# Altium PCB SFControl.PcbDoc
Units mm, origin at the board's own origin, x right, y up, seen from the top; angles counter-clockwise.
Board outline 135 x 97.5 mm, 2 copper layers (Top Layer, Bottom Layer); 79 components, 62 nets, 250 pads, 57 vias.
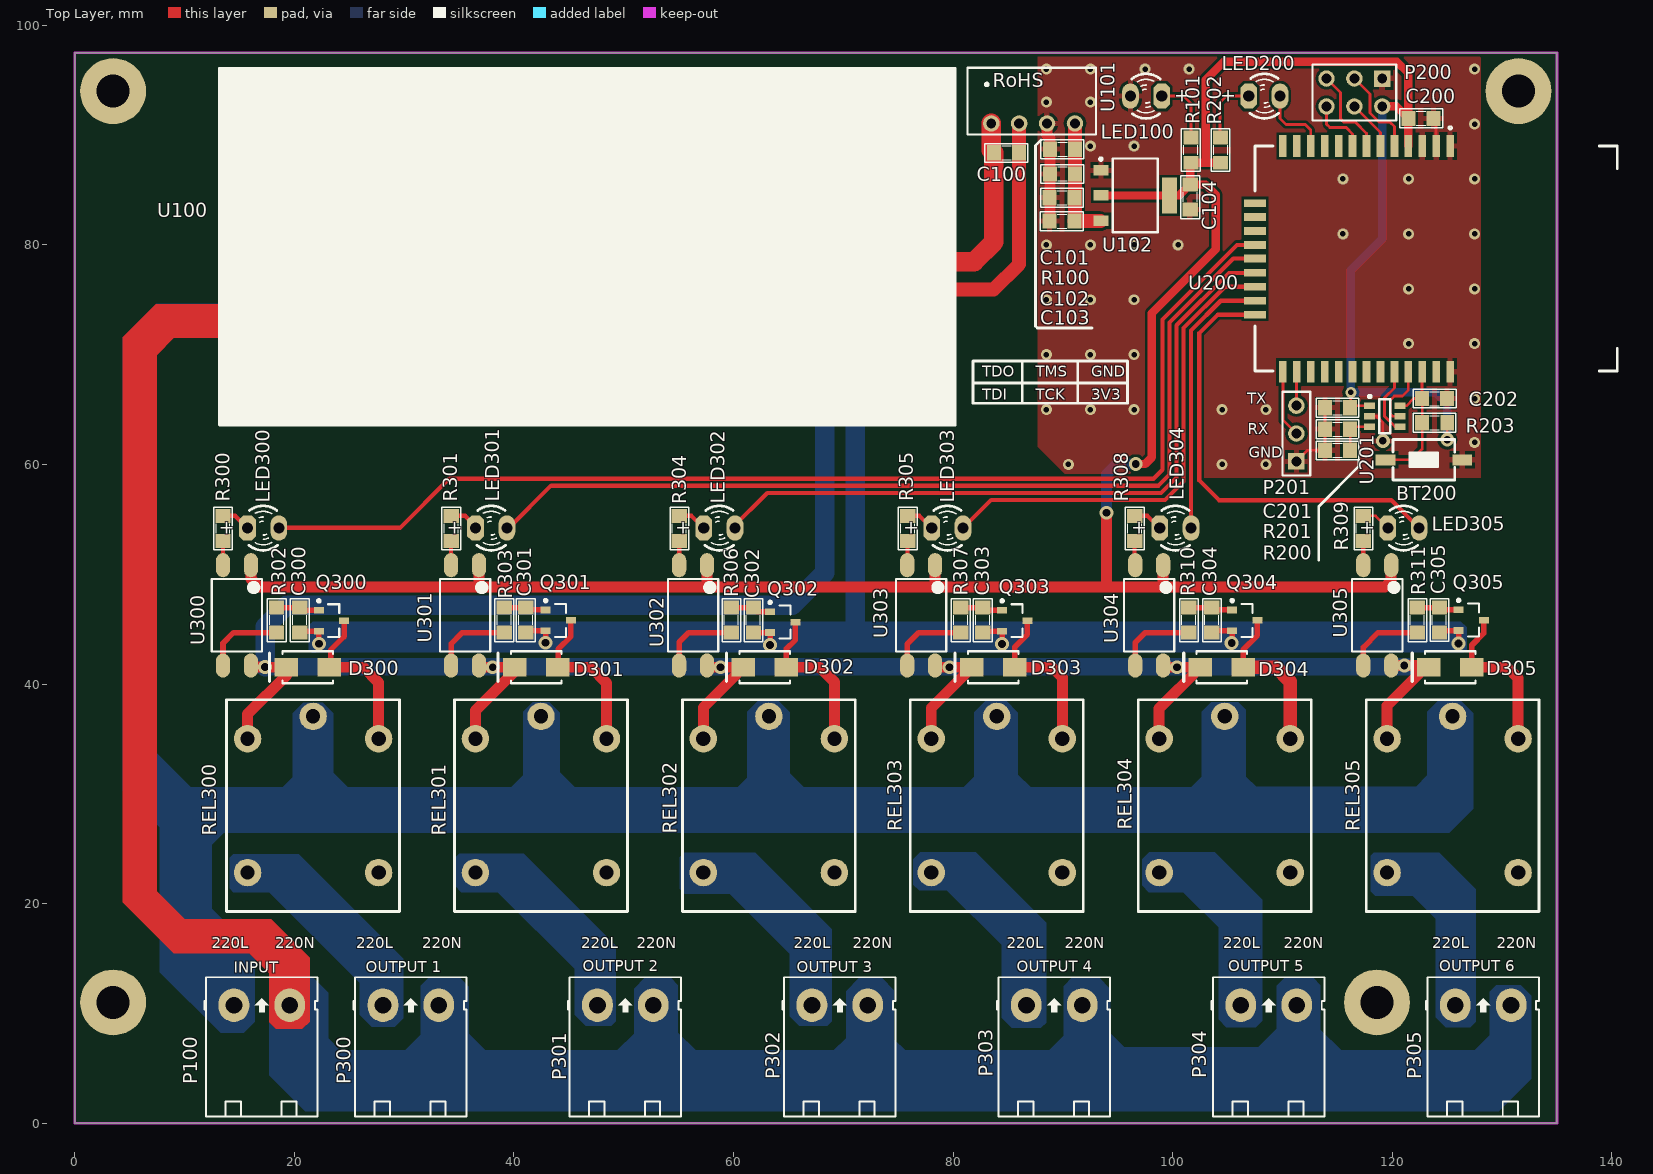
[diagram p0: Top Layer view]
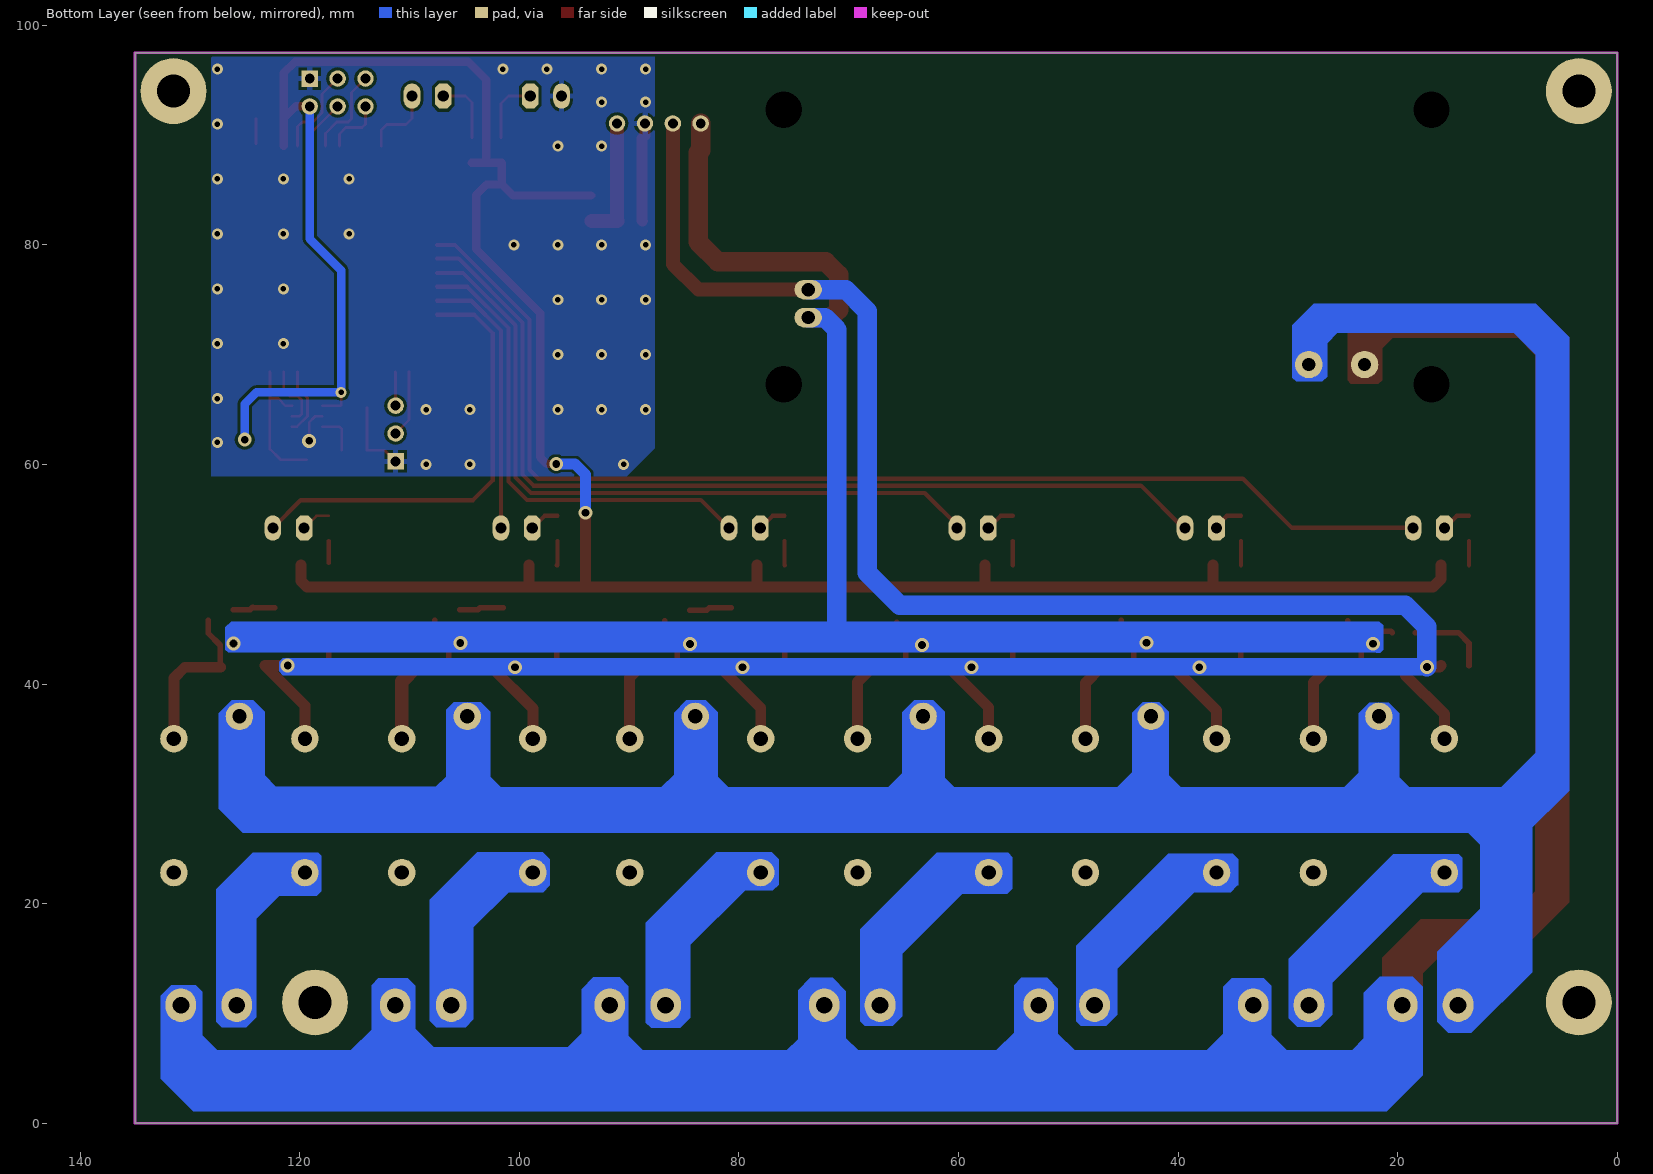
[diagram p1: Bottom Layer view, seen from below]
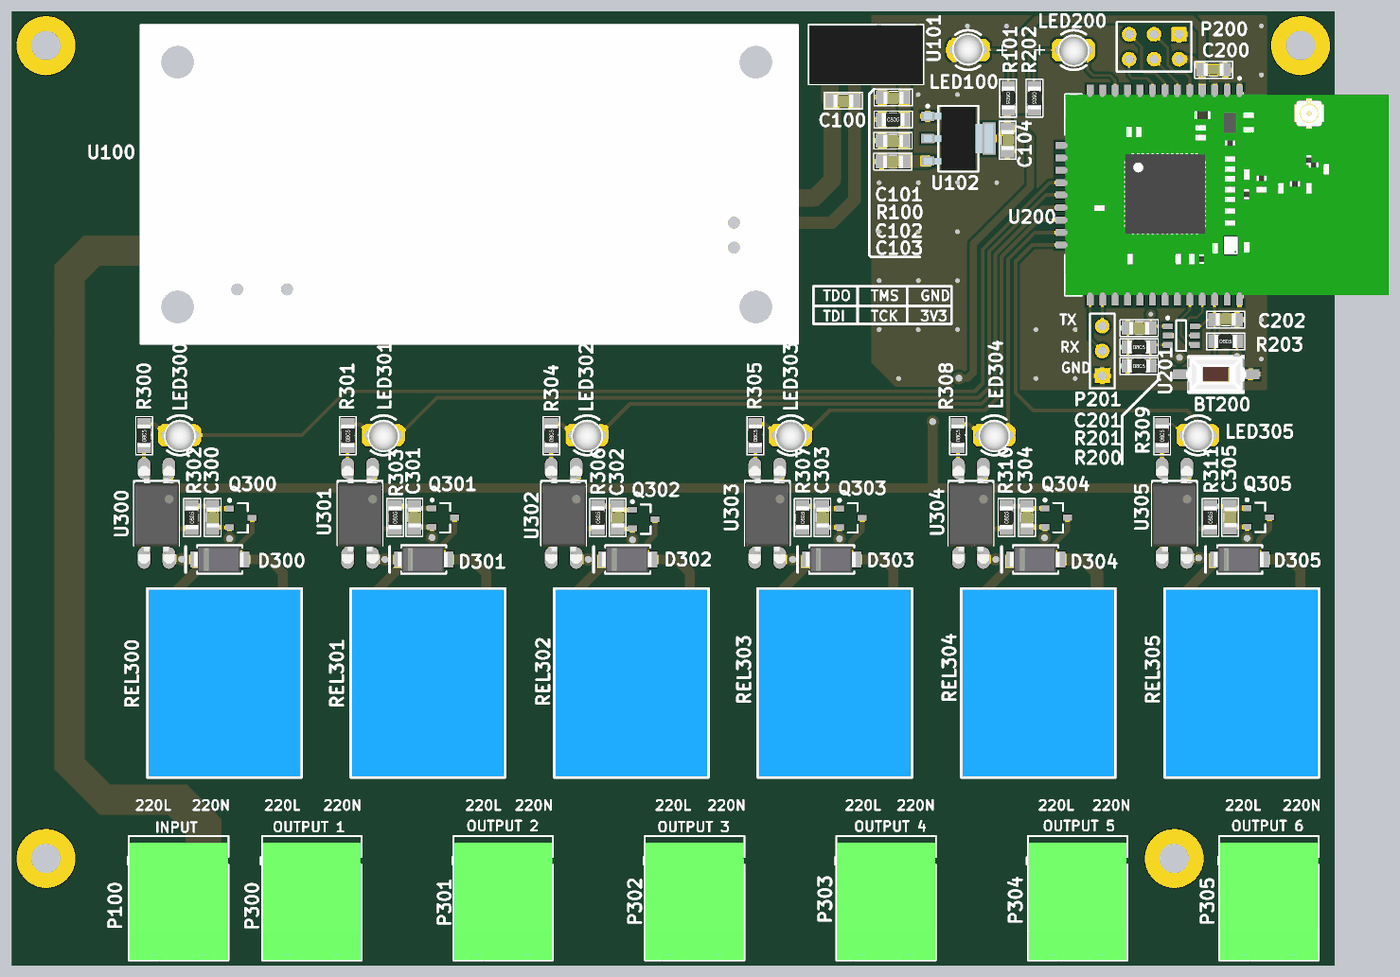
[diagram p2: 3D render of the assembled board from above, using the file's embedded part models]

## Layer stack, top to bottom
Top Solder: solder mask 0.0102, Solder Resist, Dk 3.5
Top Layer: signal copper 0.0356
Dielectric 1: dielectric 0.32, FR-4, Dk 4.8
Bottom Layer: signal copper 0.0356
Bottom Solder: solder mask 0.0102, Solder Resist, Dk 3.5

## Board outline
0,0 0,97.5 135,97.5 135,0

## Design rules (kind name [scope] priority, off if disabled: settings)
Clearance [All] p1: gap=0.254
PlaneConnect [All] p1: planeconnectstyle=Relief reliefexpansion=0.508 reliefentries=4 reliefconductorwidth=0.762 reliefairgap=0.254
PolygonConnect PolygonConnect_Via [IsVia] p1: connectstyle=Direct reliefconductorwidth=0.254 reliefentries=4 polygonreliefangle="90 Angle" airgapwidth=0.254
PolygonConnect [All] p2: connectstyle=Relief reliefconductorwidth=0.508 reliefentries=4 polygonreliefangle="90 Angle" airgapwidth=0.254
RoutingVias [All] p1: holewidth=0.711 width=1.27 viastyle="Through Hole" minholewidth=0.711 minwidth=1.27 maxholewidth=0.711 maxwidth=1.27
SolderMaskExpansion [All] p1: expansion=0.102
Width [All] p1: maxlimit=2.54 minlimit=0.254 preferedwidth=0.254
29 further rules are at their usual default settings.

## Classes and differential pairs
component class Connectivity: BT200 C200 C201 C202 LED200 P200 P201 R200 R201 R202 R203 U200 U201
component class Control: C300 C301 C302 C303 C304 C305 D300 D301 D302 D303 D304 D305 LED300 LED301 LED302 LED303 LED304 LED305 P300 P301 P302 P303 P304 P305 Q300 Q301 Q302 Q303 Q304 Q305 R300 R301 R302 R303 R304 R305 R306 R307 R308 R309 R310 R311 REL300 REL301 REL302 REL303 REL304 REL305 U300 U301 U302 U303 U304 U305
component class Power: C100 C101 C102 C103 C104 LED100 P100 R100 R101 U100 U101 U102

## Components (designator, comment, footprint, x,y, rotation, side; value= is the part's Value field where it differs from the comment)
BT200 "Button" SWSMD 122.88,60.426 r0 top
C100 "2.2uF" "0805 cap" 83.713,88.391 r0 top
C101 "2.2uF" "0805 cap" 88.818,88.721 r0 top
C102 "10uF" "0805 cap" 88.793,84.302 r0 top
C103 "0.1uF" "0805 cap" 88.767,82.168 r0 top
C104 "10uF" "0805 cap" 101.594,83.209 r90 top
C200 "0.1uF" "0805 cap" 123.769,91.515 r180 top
C201 "0.1µF" "0805 cap" 113.888,65.175 r0 top
C202 "0.1uF" "0805 cap" 125,66 r180 top
C300 "0.1uF" "0805 cap" 20.492,44.678 r90 top
C301 "0.1uF" "0805 cap" 41.066,44.678 r90 top
C302 "0.1uF" "0805 cap" 61.818,44.678 r90 top
C303 "0.1uF" "0805 cap" 82.697,44.678 r90 top
C304 "0.1uF" "0805 cap" 103.565,44.678 r90 top
C305 "0.1uF" "0805 cap" 124.302,44.703 r90 top
D300 "1N4007" SMA-diode 21.229,41.528 r0 top
D301 "1N4007" SMA-diode 42.042,41.528 r0 top
D302 "1N4007" SMA-diode 62.854,41.528 r0 top
D303 "1N4007" SMA-diode 83.667,41.528 r0 top
D304 "1N4007" SMA-diode 104.48,41.528 r0 top
D305 "1N4007" SMA-diode 125.293,41.528 r0 top
LED100 "LED 3mm green" "LED 3mm green" 99.004,93.547 r180 top
LED200 "LED 3mm green" "LED 3mm green" 106.928,93.547 r0 top
LED300 "LED 3mm green" "LED 3mm green" 15.742,54.203 r0 top locked
LED301 "LED 3mm green" "LED 3mm green" 36.515,54.203 r0 top locked
LED302 "LED 3mm green" "LED 3mm green" 57.287,54.203 r0 top locked
LED303 "LED 3mm green" "LED 3mm green" 78.059,54.203 r0 top locked
LED304 "LED 3mm green" "LED 3mm green" 98.831,54.203 r0 top locked
LED305 "LED 3mm green" "LED 3mm green" 119.603,54.203 r0 top locked
P100 "Header 2" HED2T 14.5,10.75 r0 top
P200 "Header 3X2" HDR2X3 116.555,93.877 r180 top
P201 "Header 3" HDR1X3 111.272,62.813 r90 top
P300 "Header 2" HED2T 28.076,10.75 r0 top
P301 "Header 2" HED2T 47.611,10.75 r0 top
P302 "Header 2" HED2T 67.146,10.75 r0 top
P303 "Header 2" HED2T 86.68,10.75 r0 top
P304 "Header 2" HED2T 106.215,10.75 r0 top
P305 "Header 2" HED2T 125.75,10.75 r0 top
Q300 "MMBT3904" SOT23-3LN 23.388,45.77 r0 top
Q301 "MMBT3904" SOT23-3LN 44.038,45.795 r0 top
Q302 "MMBT3904" SOT23-3LN 64.485,45.64 r0 top
Q303 "MMBT3904" SOT23-3LN 85.618,45.77 r0 top
Q304 "MMBT3904" SOT23-3LN 106.573,45.795 r0 top
Q305 "MMBT3904" SOT23-3LN 127.198,45.821 r0 top
R100 "680-0.5W" "0805 Resistor" 88.818,86.461 r0 top
R101 "1k" "0805 Resistor" 101.671,89.763 r270 top
R200 "187k" "0805 Resistor" 113.888,61.289 r0 top
R201 "182k" "0805 Resistor" 113.888,63.22 r0 top
R202 "1k" "0805 Resistor" 104.363,89.763 r270 top
R203 "10k" "0805 Resistor" 122.727,63.804 r0 top
R300 "560" "0805 Resistor" 13.507,53.034 r90 top
R301 "560" "0805 Resistor" 34.284,53.034 r90 top
R302 "1K" "0805 Resistor" 18.384,44.678 r90 top
R303 "1K" "0805 Resistor" 39.11,44.678 r90 top
R304 "560" "0805 Resistor" 55.062,53.034 r90 top
R305 "560" "0805 Resistor" 75.864,53.034 r90 top
R306 "1K" "0805 Resistor" 59.811,44.678 r90 top
R307 "1K" "0805 Resistor" 80.69,44.678 r90 top
R308 "560" "0805 Resistor" 96.54,53.034 r90 top
R309 "560" "0805 Resistor" 117.368,53.034 r90 top
R310 "1K" "0805 Resistor" 101.482,44.678 r90 top
R311 "1K" "0805 Resistor" 122.295,44.678 r90 top
REL300 "RELAY 5V 10A" "RELAY 5V-10A" 21.711,29.94 r180 top locked
REL301 "RELAY 5V 10A" "RELAY 5V-10A" 42.469,29.94 r180 top locked
REL302 "RELAY 5V 10A" "RELAY 5V-10A" 63.227,29.94 r180 top locked
REL303 "RELAY 5V 10A" "RELAY 5V-10A" 83.985,29.94 r180 top locked
REL304 "RELAY 5V 10A" "RELAY 5V-10A" 104.742,29.94 r180 top locked
REL305 "RELAY 5V 10A" "RELAY 5V-10A" 125.5,29.94 r180 top locked
U100 "ACDC" ACDC 13.177,96.062 r0 top locked
U101 "B0505S-1W" B0505S-1W 83.484,91.058 r0 top locked
U102 "AMS1117" SOT223-3 93.466,86.791 r0 top
U200 "" VZIGMOD2 107.5,89 r270 top locked
U201 "TPL5010-Q1" SOT23-6 119.324,64.388 r0 top
U300 "PC817" "PC817 SMD" 14.777,46.252 r270 top
U301 "PC817" "PC817 SMD" 35.549,46.252 r270 top
U302 "PC817" "PC817 SMD" 56.321,46.252 r270 top
U303 "PC817" "PC817 SMD" 77.094,46.252 r270 top
U304 "PC817" "PC817 SMD" 97.866,46.252 r270 top
U305 "PC817" "PC817 SMD" 118.638,46.252 r270 top

## Footprints (in the part's own frame and the unit in brackets; to place one, negate y for a bottom-side part, rotate by r counter-clockwise, add the part's x,y. Pads: shape width x height; smd on the part's side, far side on the other; paste and mask are expansions set on the pad)
"0805 cap" [mil]
  rect 50x55 smd: 1(0,0) 2(90,0)
  silkscreen extent -32,-34 121,33, body extent 5,-27 85,23, height 24
"0805 Resistor" [mil]
  rect 50x55 smd: 1(0,0) 2(90,0)
  silkscreen extent -32,-34 121,33, body extent -1,-27 89,27, height 28
ACDC [mm]
  round 0 hole 3.3 unplated: 0(3.75,-28.75) 0(3.75,-3.75) 0(62.75,-28.75) 0(62.75,-3.75)
  round 2.5 hole 1.2: 1(9.838,-26.961) 2(14.918,-26.961)
  oval 2.5x1.778 hole 1.2: 3(60.518,-22.687) 4(60.518,-20.147)
  silkscreen extent 0.02,-32.48 67.02,0.02, body extent -0.01,-32.36 67.04,0.03, height 30
B0505S-1W [mm]
  round 1.5 hole 0.9: 1(0,0) 2(2.54,0) 3(5.08,0) 4(7.62,0)
  silkscreen extent -2.16,-1.02 9.52,5.08, body extent -2.12,-1.02 9.48,4.98, height 9.75
HDR1X3 [mm] "Connector; Header; 3 Position"
  rect 1.5x1.5 hole 0.9: 1(-2.54,0)
  round 1.5 hole 0.9: 2(0,0) 3(2.54,0)
  silkscreen extent -3.81,-1.27 3.81,1.27
HDR2X3 [mm] "Connector; Header; 3x2 Position"
  rect 1.5x1.5 hole 0.9: 1(-2.54,-1.27)
  round 1.5 hole 0.9: 2(-2.54,1.27) 3(0,-1.27) 4(0,1.27) 5(2.54,-1.27) 6(2.54,1.27)
  silkscreen extent -3.81,-2.54 3.81,2.54
HED2T [mil] "Header 2, 2 pin, hight 300mil, Pin to Pin 200, Colour Green"
  oval 110x120 hole 60: 1(0,0) 2(200,0)
  silkscreen extent -105,-400 300,100, body extent -97,-399 297,73, height 334
"LED 3mm green" [mil]
  oct 60x90.55 hole 40: 1(0,0)
  oval 60x90.55 hole 40: 2(112.2,0)
  silkscreen extent 5,-80 107,80, body extent -9,-67 121,62, height 217
"PC817 SMD" [mm]
  oval 2.2x1.3 smd: 1(-4.572,1.27) 2(-4.572,-1.27) 3(4.572,-1.27) 4(4.572,1.27)
  silkscreen extent -3.3,-2.29 3.3,2.29, body extent -4.82,-2.29 5.18,2.29, height 3.86
"RELAY 5V-10A" [mm]
  round 2.5 hole 1.3: 1(0,-7.112) 2(-5.969,7.112) 3(5.969,7.112) 4(-5.969,-5.08) 5(5.969,-5.08)
  silkscreen extent -7.87,-8.64 7.87,10.67, body extent -7.75,-8.51 7.75,10.59, height 15.3
SMA-diode [mm] "SODFL, 2-Leads, Body 2.60x5.19mm, IPC Medium Density"
  rect 2.15x1.65 smd: 1(-1.95,0) 2(1.95,0)
  silkscreen extent -3.48,-1.45 2.3,1.45, body extent -2.7,-1.3 2.5,1.3, height 2.4
SOT23-3LN [mm] "SOT23, 3-Leads, Body 2.90x2.30mm, Pitch 0.95mm, IPC Medium Density"
  rect 0.9x0.6 smd: 1(-1.15,0.95) 2(1.15,0) 3(-1.15,-0.95)
  silkscreen extent -1.27,-1.5 0.7,1.92, body extent -0.7,-1.5 0.7,1.5, height 1.1
SOT23-6 [mm] "SOT23, 6-Leads, Body 2.90x2.80mm, Pitch 0.95mm, IPC Medium Density"
  rect 1x0.6 smd: 1(-1.375,0.95) 2(-1.375,0) 3(-1.375,-0.95) 4(1.375,-0.95) 5(1.375,0) 6(1.375,0.95)
  silkscreen extent -1.5,-1.55 0.5,1.92, body extent -0.88,-1.52 0.87,1.53, height 1.45
SOT223-3 [mm]
  rect 1.35x0.95 smd: 1(0,0) 2(0,-2.29) 3(0,-4.58)
  rect 1.35x3.3 smd: 4(6.25,-2.29)
  silkscreen extent -0.12,-5.65 5.18,1.15, body extent -0.42,-5.54 6.67,0.96, height 1.65
SWSMD [mm]
  rect 1.8x1 smd: 1(-3.5,0) 2(3.5,0)
  silkscreen extent -2.82,-1.85 2.82,1.85, body extent -3.05,-1.85 3.05,1.85, height 2.5
VZIGMOD2 [mm]
  rect 2x0.7 smd: 1(0,17.78) 2(0,16.51) 3(0,15.24) 4(0,13.97) 5(0,12.7) 6(0,11.43) 7(0,10.16) 8(0,8.89) 9(0,7.62) 10(0,6.35) 11(0,5.08) 12(0,3.81) 13(0,2.54) 23(20.56,2.54) 24(20.56,3.81) 25(20.56,5.08) 26(20.56,6.35) 27(20.56,7.62) 28(20.56,8.89) 29(20.56,10.16) 30(20.56,11.43) 31(20.56,12.7) 32(20.56,13.97) 33(20.56,15.24) 34(20.56,16.51) 35(20.56,17.78)
  rect 0.7x2 smd: 14(5.2,0) 15(6.47,0) 16(7.74,0) 17(9.01,0) 18(10.25,0) 19(11.55,0) 20(12.82,0) 21(14.09,0) 22(15.36,0)
  silkscreen extent -1.79,0 20.5,33, body extent 0,0 20.5,33, height 2.05

## Part data
C100 C101 C102 C103 C104 C202 C300 C301 C302 C303 C304 C305: library part "cap SMD"
C200: library part CAP0.1u0402, "CAP CER 0.1UF 16V X7R 0402"
C201: library part CAP0.1u0402, "CAP CER 0.1UF 10V X7R 0402"
D300 D301 D302 D303 D304 D305: library part "Diode Schottky"
P100 P300 P301 P302 P303 P304 P305: "Header, 2-Pin"
P200: "Header, 3-Pin, Dual row"
P201: "Header, 3-Pin"
Q300 Q301 Q302 Q303 Q304 Q305: "TRANS NPN 40V 0.2A SOT-23"
R100 R101 R202 R203 R300 R301 R302 R303 R304 R305 R306 R307 R308 R309 R310 R311: library part Resistor
R200: library part Resistor, "RES SMD 187K OHM 1% 1/10W 0603"
R201: library part Resistor, "RES SMD 182K OHM 1% 1/10W 0603"
U200: library part VZIGMOD2, "VNPT ZIGBEE MODULE V1 - No-PA"
U201: library part TPL5010, "IC TIMER W/WATCHDOG 6SOT"

## Free pads (board coordinates)
  round 6 hole 3: ""(3.5,11) ""(3.5,94) ""(118.612,11) ""(131.5,94)

## Via types
v1: diameter 1, hole 0.5, Top Layer to Bottom Layer, tented both sides, 41 vias
v2: diameter 1.27, hole 0.711, Top Layer to Bottom Layer, tented both sides, 16 vias

## Nets (pads, with @x,y where several pads share a name; then routed paths per layer and width w, separated by ;. In a path a pad name is that pad's centre, name@x,y a point inside that pad or via, vN(x,y) a via of type N, cw(c..) or ccw(c..) an arc to the next point about the centre after c; other vN are vias at no path point)
220L: P100.1 REL300.1 REL301.1 REL302.1 REL303.1 REL304.1 REL305.1 U100.2
220N: P100.2 P300.2 P301.2 P302.2 P303.2 P304.2 P305.2 U100.1
CTRL1: LED300.2 U200.17 | length 107.7
  Top Layer w0.381: LED300.2@18.592,54.38 18.745,54.228 29.636,54.228 34.107,58.698 98.267,58.698 99.08,59.511 99.08,73.202 105.868,79.99 U200.17
CTRL2: LED301.2 U200.18 | length 86.2
  Top Layer w0.381: LED301.2@39.537,54.203 43.398,58.063 98.699,58.063 99.715,59.079 99.715,72.939 105.526,78.75 U200.18
CTRL3: LED302.2 U200.19 | length 65.4
  Top Layer w0.381: LED302.2@59.872,54.203 63.073,57.403 98.936,57.403 100.35,58.816 100.35,72.676 105.124,77.45 U200.19
CTRL4: LED303.2 U200.20 | length 43.9
  Top Layer w0.381: LED303.2 83.474,56.768 99.308,56.768 100.985,58.444 100.985,72.413 104.752,76.18 U200.20
CTRL5: LED304.2 U200.21 | length 24.9
  Top Layer w0.381: LED304.2 101.681,72.211 104.38,74.91 U200.21
CTRL6: LED305.2 U200.22 | length 41
  Top Layer w0.381: U200.22 104.115,73.64 102.433,71.957 102.433,58.546 104.236,56.743 119.913,56.743 LED305.2
DONE: U200.31 U201.4 | length 6.2
  Top Layer w0.254: U200.31 120.2,66.966 119.31,66.076 119.31,64.384 120.255,63.438 U201.4
GND: BT200.2 C101.1 C102.1 C103.1 C104.1 C200.1 C201.1 C202.1 LED100.2 P200.1 P201.1 R100.1 R200.1 R201.1 U101.3 U102.1 U200.1 U200.2 U200.3 U200.35 U201.2 | length 21.3
  Top Layer w0.254: P201.1 112.288,61.289 R200.1 R201.1 C201.1 ; U201.2 118.587,64.388 119.146,63.829 v2(119.146,62.153) ; U200.2@123.997,89.216 C200.1@123.997,91.49
  Top Layer w1: U101.3 88.564,89.94 88.818,89.686 C101.1 R100.1 88.818,82.219 C103.1
  other v1: 90.5,60 104.5,60 108.5,60 127.5,62 88.5,65 92.5,65 96.5,65 104.5,65 108.5,65 127.5,66 88.5,70 92.5,70 96.5,70 121.5,71 127.5,71 88.5,75 92.5,75 96.5,75 121.5,76 127.5,76 88.5,80 92.5,80 96.5,80 100.5,80 115.5,81 121.5,81 127.5,81 115.5,86 121.5,86 127.5,86 92.5,89 96.5,89 127.5,91 88.5,93 92.5,93 88.5,96 92.5,96 97.5,96 101.5,96 127.5,96
LED: LED200.2 U200.11 | length 6.7
  Top Layer w0.254: LED200.2 109.778,91.51 110.332,90.956 112.085,90.956 112.58,90.461 U200.11
NetC300_2: C300.2 Q300.1 R302.2 | length 4
  Top Layer w0.508: R302.2 C300.2 20.736,46.72 Q300.1
NetC301_2: C301.2 Q301.1 R303.2 | length 3.9
  Top Layer w0.508: R303.2 C301.2 41.285,46.745 Q301.1
NetC302_2: C302.2 Q302.1 R306.2 | length 3.7
  Top Layer w0.508: R306.2 C302.2 62.192,46.59 Q302.1
NetC303_2: C303.2 Q303.1 R307.2 | length 3.9
  Top Layer w0.508: R307.2 C303.2 82.941,46.72 Q303.1
NetC304_2: C304.2 Q304.1 R310.2 | length 4
  Top Layer w0.508: R310.2 C304.2 103.783,46.745 Q304.1
NetC305_2: C305.2 Q305.1 R311.2 | length 3.9
  Top Layer w0.508: R311.2 124.277,46.964 C305.2 124.52,46.771 Q305.1
NetD300_2: D300.2 Q300.2 REL300.4 | length 14.8
  Top Layer w0.508: D300.2@23.306,41.706 23.306,43.097 24.538,44.329 Q300.2
  Top Layer w1: D300.2 26.283,41.528 27.68,40.131 REL300.4
NetD301_2: D301.2 Q301.2 REL301.4 | length 14.7
  Top Layer w0.508: D301.2@44.038,41.706 44.038,43.179 45.188,44.329 Q301.2
  Top Layer w1: D301.2 47.01,41.528 48.438,40.1 REL301.4
NetD302_2: D302.2 Q302.2 REL302.4 | length 14.6
  Top Layer w0.508: D302.2 64.804,43.194 65.635,44.024 Q302.2
  Top Layer w1: D302.2 67.838,41.528 69.196,40.17 REL302.4
NetD303_2: D303.2 Q303.2 REL303.4 | length 15
  Top Layer w0.508: D303.2 85.617,43.356 86.768,44.507 Q303.2
  Top Layer w1: D303.2 88.996,41.528 89.954,40.57 REL303.4
NetD304_2: D304.2 Q304.2 REL304.4 | length 14.8
  Top Layer w0.508: D304.2 106.43,43.138 107.723,44.431 Q304.2
  Top Layer w1.27: D304.2 109.418,41.528 110.711,40.234 REL304.4
NetD305_2: D305.2 Q305.2 REL305.4 | length 14.9
  Top Layer w0.508: D305.2 127.243,43.529 128.348,44.634 Q305.2
  Top Layer w1: D305.2 130.474,41.528 131.469,40.533 REL305.4
NetLED100_1: LED100.1 R101.1 | length 6
  Top Layer w0.254: LED100.1 100.985,93.547 101.671,92.861 R101.1
NetLED200_1: LED200.1 R202.1 | length 6.1
  Top Layer w0.254: R202.1@104.312,89.763 104.312,92.963 104.896,93.547 LED200.1
NetLED300_1: LED300.1 R300.2 | length 2.7
  Top Layer w0.381: R300.2 14.625,55.32 LED300.1
NetLED301_1: LED301.1 R301.2 | length 2.9
  Top Layer w0.381: R301.2 35.57,55.32 LED301.1@36.687,54.203
NetLED302_1: LED302.1 R304.2 | length 2.7
  Top Layer w0.381: R304.2 56.169,55.32 LED302.1
NetLED303_1: LED303.1 R305.2 | length 2.7
  Top Layer w0.381: R305.2 76.941,55.32 LED303.1
NetLED304_1: LED304.1 R308.2 | length 2.8
  Top Layer w0.381: R308.2 97.713,55.32 LED304.1
NetLED305_1: LED305.1 R309.2 | length 2.7
  Top Layer w0.254: R309.2 118.485,55.32 LED305.1
NetP300_1: P300.1 REL300.3 | length 19
  Bottom Layer w2.54: REL300.3 18.796,22.828 28.076,13.548 P300.1
NetP301_1: P301.1 REL301.3 | length 18.4
  Bottom Layer w2.54: REL301.3 39.396,22.828 47.611,14.612 P301.1
NetP302_1: P302.1 REL302.3 | length 18.5
  Bottom Layer w2.54: REL302.3 61.189,22.828 67.146,16.871 P302.1
NetP303_1: P303.1 REL303.3 | length 17.6
  Bottom Layer w2.54: REL303.3 81.331,22.828 86.68,17.478 P303.1
NetP304_1: P304.1 REL304.3 | length 17.1
  Bottom Layer w2.54: REL304.3 102.159,22.828 106.215,18.772 P304.1
NetP305_1: P305.1 REL305.3 | length 16.3
  Bottom Layer w2.54: REL305.3 122.403,22.828 125.75,19.481 P305.1
NetR200_2: R200.2 R201.2 U201.3 | length 3.8
  Top Layer w0.254: R200.2 R201.2 116.392,63.438 U201.3
NetR300_1: R300.1 U300.2 | length 2.2
  Top Layer w0.381: U300.2 R300.1
NetR301_1: R301.1 U301.2 | length 2.2
  Top Layer w0.381: U301.2 34.279,53.029 R301.1
NetR302_1: R302.1 U300.3 | length 7.3
  Top Layer w0.508: U300.3 13.507,43.712 14.472,44.678 R302.1
NetR303_1: R303.1 U301.3 | length 7.2
  Top Layer w0.508: U301.3 34.279,43.657 35.3,44.678 R303.1
NetR304_1: R304.1 U302.2 | length 2.2
  Top Layer w0.381: U302.2 U302.2@55.062,50.835 ; U302.2@55.062,50.824 R304.1
NetR305_1: R305.1 U303.2 | length 2.3
  Top Layer w0.381: U303.2 U303.2@75.864,50.865 ; U303.2@75.864,50.824 R305.1
NetR306_1: R306.1 U302.3 | length 7.2
  Top Layer w0.508: U302.3 55.051,43.804 55.925,44.678 R306.1
NetR307_1: R307.1 U303.3 | length 7.2
  Top Layer w0.508: U303.3 75.824,43.621 76.88,44.678 R307.1
NetR308_1: R308.1 U304.2 | length 2.3
  Top Layer w0.381: U304.2@96.54,50.824 R308.1 ; U304.2@96.54,50.88 U304.2
NetR309_1: R309.1 U305.2 | length 2
  Top Layer w0.381: U305.2@117.368,51.028 R309.1
NetR310_1: R310.1 U304.3 | length 7.4
  Top Layer w0.508: U304.3 96.596,43.768 97.505,44.678 R310.1
NetR311_1: R311.1 U305.3 | length 7.1
  Top Layer w0.508: U305.3 117.368,43.331 118.714,44.678 R311.1
P3V3: C104.2 C200.2 C201.2 P200.2 R101.2 R202.2 R203.2 U102.2 U102.4 U200.4 U201.1 U300.1 U301.1 U302.1 U303.1 U304.1 U305.1 | length 255.8
  Top Layer w0.254: v1(116.225,66.572) 116.225,65.428 116.315,65.338 U201.1 ; v2(125.013,62.254) R203.2
  Top Layer w0.762: U102.2 U102.4 100.6,84.501 C104.2 ; v2(96.641,60.045) 97.505,60.045 98.115,60.654 98.115,73.786 103.931,79.603 103.931,84.556 102.991,85.495 C104.2 ; R101.2@101.594,87.477 C104.2 ; R101.2 102.941,87.477 ; R202.2 102.941,87.477 ; P200.2 120.378,92.607 C200.2@121.47,91.515 ; C200.2 121.483,89.013 U200.4 C200.2@121.47,91.515 ; 102.941,87.477 103.004,87.54 103.004,95.033 104.642,96.671 120.441,96.671 121.47,95.643 C200.2@121.47,91.515
  Top Layer w1: U300.1 16.047,49.554 16.784,48.818 36.723,48.818 ; U301.1 36.819,48.914 36.723,48.818 ; U302.1 57.591,48.853 57.627,48.818 ; U303.1 78.364,48.828 78.353,48.818 ; v2(93.974,55.6) 93.974,48.818 ; U304.1 99.136,48.823 99.131,48.818 ; U305.1 119.908,49.377 119.349,48.818 99.131,48.818 ; 36.723,48.818 57.627,48.818 ; 57.627,48.818 78.353,48.818 ; 78.353,48.818 93.974,48.818 ; 93.974,48.818 99.131,48.818
  Bottom Layer w0.762: P200.2 119.095,80.542 116.225,77.672 v1(116.225,66.572) 123.946,66.572 125.013,65.506 v2(125.013,62.254)
  Bottom Layer w1: v2(93.974,55.6) 93.974,59.079 94.94,60.045 v2(96.641,60.045)
P5V0: C100.2 D300.1 D301.1 D302.1 D303.1 D304.1 D305.1 REL300.5 REL301.5 REL302.5 REL303.5 REL304.5 REL305.5 U100.4 U101.2 U300.4 U301.4 U302.4 U303.4 U304.4 U305.4 | length 182
  Top Layer w1: REL300.5 15.742,37.255 19.279,40.791 D300.1 16.2,41.528 U300.4@16.174,41.553 ; U300.4 U300.4@16.174,41.553 ; v2(17.343,41.553) U300.4@16.174,41.553 ; REL301.5 36.5,37.597 D301.1@40.092,41.188 ; U301.4 36.972,41.528 v2(38.069,41.528) D301.1 ; REL302.5 57.258,37.882 D302.1 v2(58.821,41.528) 57.744,41.528 U302.4 ; REL303.5 78.016,37.826 D303.1 v2(79.674,41.528) 78.516,41.528 U303.4 ; REL304.5 98.773,37.771 D304.1 v2(100.401,41.528) 99.288,41.528 U304.4 ; REL305.5 119.531,38.021 123.19,41.68 v2(121.102,41.68) U305.4
  Top Layer w1.27: U100.4 83.683,75.915 85.999,78.231 C100.2 85.999,91.033 U101.2
  Bottom Layer w1.778: v2(17.343,41.553) 17.343,45.211 19.298,47.167 65.349,47.167 68.32,50.139 68.32,73.964 70.272,75.915 U100.4
P5V0_ISO: C101.2 C102.2 C103.2 R100.2 U101.4 U102.3 | length 11.3
  Top Layer w1.27: U101.4 C101.2 R100.2 91.104,82.219 C103.2 U102.3@93.424,82.168
PGND: C100.1 C300.1 C301.1 C302.1 C303.1 C304.1 C305.1 Q300.3 Q301.3 Q302.3 Q303.3 Q304.3 Q305.3 U100.3 U101.1 | length 80
  Top Layer w0.508: C300.1 20.634,44.82 Q300.3 v2(22.238,43.669) ; C301.1 41.234,44.845 Q301.3 v2(42.888,43.756) ; C302.1 63.323,44.678 Q302.3 v2(63.335,43.542) ; C303.1 82.839,44.82 Q303.3 v2(84.468,43.643) ; C304.1 103.732,44.845 Q304.3 105.423,43.782 v2(105.379,43.738) ; C305.1 124.47,44.871 Q305.3 v2(126.048,43.694)
  Top Layer w1.778: U100.3 71.627,73.375 70.911,74.091 70.911,77.266 72.105,78.46 81.909,78.46 83.713,80.263 C100.1 83.484,88.62 U101.1
  Bottom Layer w1.778: 71.089,44.195 71.089,72.287 72.177,73.375 U100.3
RST: BT200.1 C202.2 R203.1 U200.33 U201.6 | length 13.1
  Top Layer w0.254: BT200.1 121.737,60.426 122.727,61.416 R203.1 122.727,65.987 C202.2 ; U201.6 121.29,65.338 121.952,66 C202.2 ; U200.33 122.714,68.414 C202.2
RX_DBG_ZB: P201.2 U200.23 | length 6.1
  Top Layer w0.254: U200.23 110.04,64.045 P201.2
TCK: P200.4 U200.6 | length 4.6
  Top Layer w0.254: P200.4 118.93,90.232 U200.6
TDI: P200.6 U200.8 | length 5.5
  Top Layer w0.254: P200.6 114.015,90.982 114.32,90.677 115.818,90.677 116.39,90.105 U200.8
TDO: P200.5 U200.7 | length 8.3
  Top Layer w0.254: P200.5 115.285,93.877 115.285,91.49 115.59,91.185 116.631,91.185 117.66,90.156 U200.7
TMS: P200.3 U200.5 | length 8.2
  Top Layer w0.254: P200.3 117.964,93.738 117.964,92.011 118.79,91.185 119.781,91.185 120.2,90.766 U200.5
TX_DBG_ZB: P201.3 U200.24 | length 3.1
  Top Layer w0.254: P201.3 111.272,68.402 U200.24
WAKE: U200.32 U201.5 | length 5.9
  Top Layer w0.254: U201.5 120.024,64.388 119.818,64.594 119.818,65.865 120.194,66.242 120.924,66.242 121.47,66.788 U200.32
pads on no net: REL300.2 REL301.2 REL302.2 REL303.2 REL304.2 REL305.2 U100.0 U200.9 U200.10 U200.12 U200.13 U200.14 U200.15 U200.16 U200.25 U200.26 U200.27 U200.28 U200.29 U200.30 U200.34

## Polygon pours and split planes (outlines as drawn)
GND on Top Layer "GND_L01_P000" (solid, remove dead copper, pour order 0): 87.701,97.51 87.7,61.62 90.52,58.8 128.059,58.8 128.063,97.501
GND on Bottom Layer "GND_L02_P004" (solid, remove dead copper, pour order 4): 87.701,97.51 87.65,97.459 87.65,77.799 87.65,61.492 90.215,58.927 128.059,58.927 128.063,97.501

## Keep-outs
Keep-Out Layer:
  the board outline again, w0.254

## Other copper
Top Layer:
  region net 220N: 24.531,67.665 24.531,73.532 23.464,74.599 7.386,74.599 4.389,71.602 4.389,20.116 9.037,15.468 15.895,15.468 17.724,13.639 17.724,9.194 18.333,8.584 20.746,8.584 21.407,9.245 21.407,15.061 17.901,18.566 10.002,18.566 7.462,21.106 7.462,69.951 9.037,71.525 20.467,71.525 21.407,70.586 21.407,67.69 21.762,67.334 24.277,67.334 24.328,67.385
Bottom Layer:
  region net PGND: 21.94,42.849 21.61,42.849 21.33,43.128 21.33,45.338 21.686,45.694 126.258,45.694 126.791,45.16 126.791,43.128 126.537,42.874
  region net P5V0: 16.885,42.341 121.559,42.341 121.889,42.011 121.889,41.172 121.533,40.817 16.962,40.817 16.606,41.172 16.606,42.061
  region net 220L: 26.868,67.563 29.255,67.563 29.585,67.893 29.585,72.668 27.63,74.624 7.437,74.624 4.389,71.576 4.389,30.301 8.326,26.364 9.392,26.364 10.891,27.863 10.891,30.276 7.437,33.73 7.437,69.976 9.443,71.983 25.496,71.983 26.436,71.043 26.436,67.995
  region net 220L: 124.249,38.504 126.209,38.504 127.375,37.337 127.375,28.625 125.191,26.44 13.558,26.44 12.466,25.348 12.466,19.532 16.403,15.595 16.403,9.245 15.412,8.254 13.279,8.254 7.767,13.766 7.767,27.99 10.358,30.581 18.943,30.581 19.857,31.495 19.857,37.337 20.825,38.304 22.598,38.304 23.566,37.337 23.566,31.901 24.886,30.581 39.745,30.581 40.838,31.673 40.838,37.464 41.727,38.353 43.2,38.353 44.165,37.388 44.165,31.978 45.562,30.581 60.396,30.581 61.259,31.444 61.259,37.464 62.302,38.507 64.052,38.507 65.12,37.439 65.12,31.876 66.415,30.581 80.97,30.581 81.935,31.546 81.935,37.413 83.028,38.507 84.778,38.507 85.897,37.388 85.897,31.749 87.066,30.581 101.696,30.581 102.661,31.546 102.661,37.489 103.524,38.352 105.964,38.352 106.674,37.642 106.674,31.571 107.614,30.631 122.168,30.631 123.21,31.673 123.21,37.464
  region net 220N: 129.712,12.572 131.693,12.572 132.659,11.607 132.659,4.063 129.687,1.091 21,1.091 17.724,4.368 17.724,12.42 18.638,13.334 21.635,13.334 23.083,11.886 23.083,7.72 24.149,6.654 30.119,6.654 31.516,8.051 31.516,12.496 32.202,13.182 35.123,13.182 35.885,12.42 35.885,8.127 37.384,6.628 49.423,6.628 50.947,8.152 50.947,12.242 51.937,13.232 54.274,13.232 54.935,12.572 54.935,8.254 56.56,6.628 69.133,6.628 70.251,7.746 70.251,12.013 71.47,13.232 73.502,13.232 74.62,12.115 74.62,7.644 75.636,6.628 88.742,6.628 90.063,7.949 90.063,12.47 90.876,13.283 93.263,13.283 94.33,12.216 94.33,8.203 95.6,6.933 107.817,6.933 109.468,8.584 109.468,12.496 110.154,13.182 112.847,13.182 113.456,12.572 113.456,8.508 115.336,6.629 127.503,6.629 128.874,8 128.874,11.953 129.458,12.572
  region net NetP305_1: 118.333,24.637 124.277,24.637 127.604,21.31 127.604,9.245 127.096,8.737 124.861,8.737 123.946,9.651 123.946,18.643 121.889,20.7 118.46,20.7 118.054,21.106 118.054,24.358
  region net NetP304_1: 97.861,24.688 103.83,24.688 108.173,20.344 108.173,9.321 107.589,8.737 104.896,8.737 104.185,9.448 104.185,17.855 100.985,21.056 97.835,21.056 97.226,21.665 97.226,24.053
  region net NetP303_1: 77.007,24.662 82.087,24.662 88.488,18.262 88.488,9.168 88.005,8.686 85.338,8.686 84.424,9.6 84.424,16.23 79.446,21.208 76.902,21.208 76.372,21.738 76.372,24.027
  region net NetP302_1: 55.697,24.612 61.97,24.612 68.93,17.652 68.93,9.27 68.549,8.889 65.984,8.889 65.145,9.727 65.145,15.417 59.659,20.903 55.544,20.903 55.112,21.335 55.112,24.231 55.493,24.612
  region net NetP301_1: 35.046,24.535 40.914,24.535 49.296,16.153 49.296,9.295 48.864,8.864 46.527,8.864 45.537,9.854 45.537,14.045 38.526,21.056 35.224,21.056 34.615,21.665 34.538,21.665 34.538,24.027
  region net NetP300_1: 14.422,24.485 20.416,24.485 29.916,14.985 29.916,9.549 29.154,8.787 27.071,8.787 25.979,9.88 25.979,12.801 17.724,21.056 14.447,21.056 14.117,21.386 14.117,24.18

## Silkscreen, mask and mechanical layers (free items; w line width, h text height)
Top Overlay:
  rectangle: 13.192,63.581 80.192,96.081
  lines w0.254: 81.808,65.582 81.808,69.417 95.879,69.417 95.879,65.582 81.833,65.582 ; 81.808,67.411 95.752,67.411 ; 86.304,65.633 86.304,69.392 ; 88.005,89.559 87.497,89.051 87.497,72.592 87.675,72.414 92.654,72.414 ; 91.358,65.582 91.358,69.417 ; 113.304,51.282 113.304,56.184 116.961,59.841 116.961,60.426
  text "TDO" at 82.671,67.995 h1
  text "TMS" at 87.548,67.995 h1
  text "GND" at 92.577,67.995 h1
  text "TDI" at 82.671,65.912 h1
  text "TCK" at 87.548,65.912 h1
  text "3V3" at 92.577,65.912 h1
  text "TX" at 106.776,65.531 h1
  text "RX" at 106.827,62.737 h1
  text "GND" at 106.928,60.629 h1
  text "220L" at 12.466,15.95 h1
  text "220N" at 18.257,15.95 h1
  text "220L" at 25.648,15.95 h1
  text "220N" at 31.668,15.95 h1
  text "220L" at 46.146,15.95 h1
  text "220N" at 51.201,15.95 h1
  text "220L" at 65.501,15.95 h1
  text "220N" at 70.86,15.95 h1
  text "220L" at 84.881,15.95 h1
  text "220N" at 90.164,15.95 h1
  text "220L" at 104.592,15.95 h1
  text "220N" at 110.129,15.95 h1
  text "220L" at 123.667,15.95 h1
  text "220N" at 129.534,15.95 h1
  text "OUTPUT 2" at 46.273,13.842 h1
  text "OUTPUT 5" at 105.074,13.842 h1
  text "OUTPUT 6" at 124.302,13.842 h1
  text "OUTPUT 4" at 85.821,13.791 h1
  text "OUTPUT 1" at 26.512,13.74 h1
  text "OUTPUT 3" at 65.755,13.74 h1
  text "INPUT" at 14.498,13.69 h1
Bottom Solder:
  drawing of 8 lines, arcs and shapes, not listed

## Text inside footprints (layer, text, board x,y; h text height)
LED100: Top Overlay "+" at 100.154,93.022 h1.27
LED200: Top Overlay "+" at 105.778,94.072 h1.27 r180
LED300: Top Overlay "+" at 14.592,54.728 h1.27 r180
LED301: Top Overlay "+" at 35.365,54.728 h1.27 r180
LED302: Top Overlay "+" at 56.137,54.728 h1.27 r180
LED303: Top Overlay "+" at 76.909,54.728 h1.27 r180
LED304: Top Overlay "+" at 97.681,54.728 h1.27 r180
LED305: Top Overlay "+" at 118.453,54.728 h1.27 r180
U101: Top Overlay "RoHS" at 83.611,94.36 h1.27